# EAGLE board rapidshark-main-breakout-top-mk-1.7-fab (EAGLE 6.5.0)
VERSION: v1.7
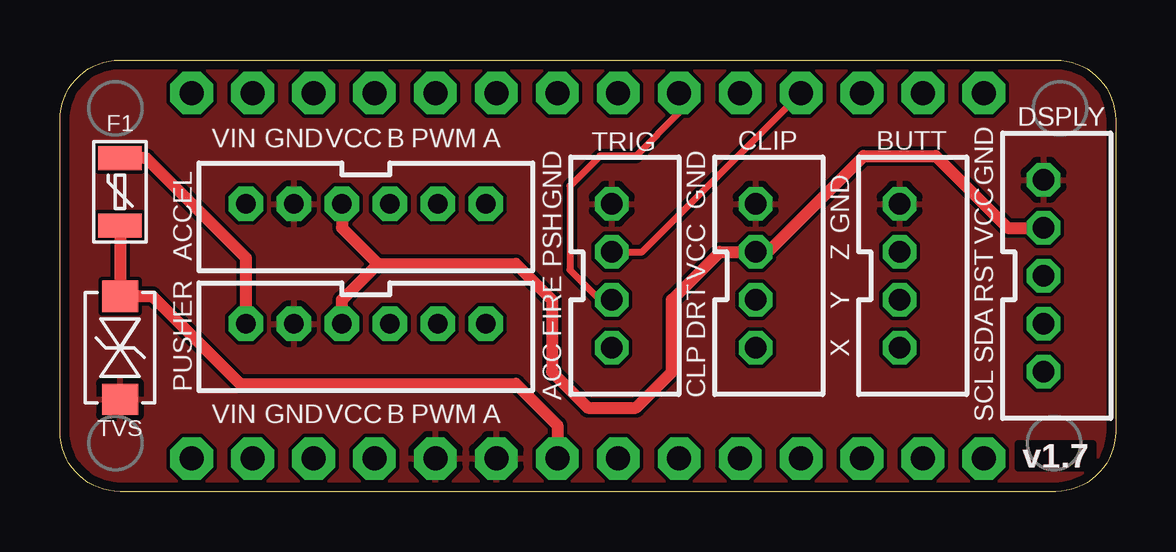
[diagram p0: board, top side]
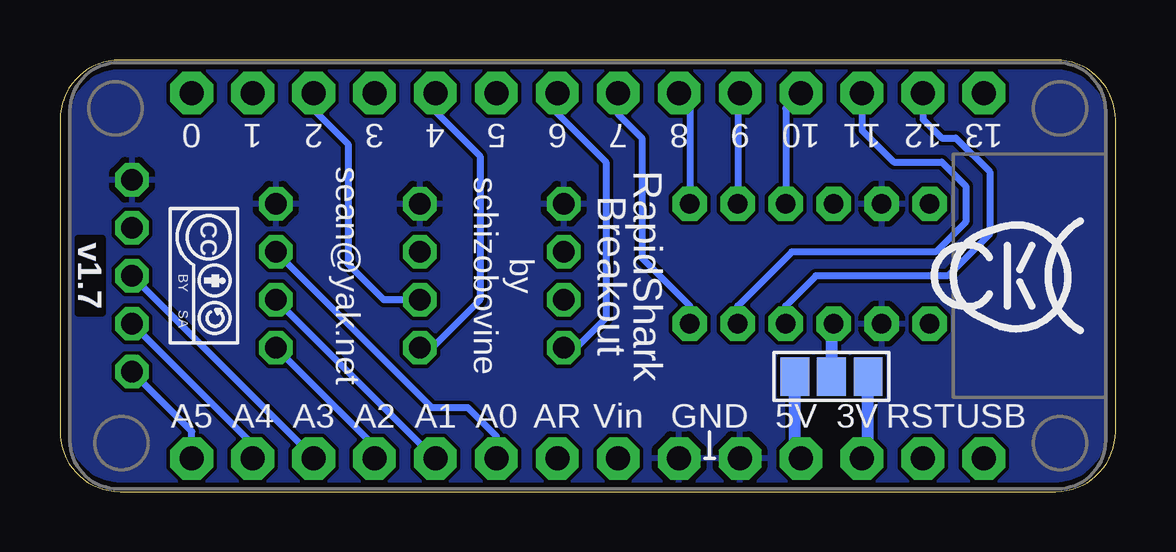
[diagram p1: board, bottom side, seen from below]

Size 44 x 18 mm. Coordinates in mm from the lower left corner, seen from the top.
Outline: 2.5,18 41.5,18 arc-90 44,15.5 44,2.5 arc-90 41.5,0 2.5,0 arc-90 0,2.5 0,15.5 arc-90 2.5,18
Copper layers (1*16): Top 0.0356mm / dielectric 1.5011mm / Bottom 0.0356mm
Design rules "LaenPCBOrder_2": minimum track width 6mil, minimum drill 13mil, track to track 6mil, track to pad 6mil, pad to pad 6mil, via to via 6mil, smd to smd 6mil, copper to edge 15mil, drill to drill 6mil, minimum pad ring 7mil, minimum via ring 7mil, stop-mask expansion 3mil, vias tented up to drill 20mil, thermal gap 10mil

## Footprints (pad centres in the part's own frame; a part is rotated, then mirrored left to right if it is on the bottom)
JST-6-PH-VERT-PTH = drill 0.8 pad 1.422 octagon: 1 -5,0; 2 -3,0; 3 -1,0; 4 1,0; 5 3,0; 6 5,0
JST-4-PH-VERT-PTH = drill 0.9 pad 1.4 octagon: 1 0,0; 2 2,0; 3 4,0; 4 6,0
JST-5-PH-VERT-PTH = drill 0.9 pad 1.4 octagon: 1 -4,0; 2 -2,0; 3 0,0; 4 2,0; 5 4,0
PTC-1206 = smd 1 x 1.8: 1 -1.4,0; 2 1.4,0
SMA-DIODE-TVS-BIDIR = smd 1.3 x 1.5: 1 -2.15,0; 2 2.15,0
ADAFRUIT_METRO_MINI_BACK = drill 1 pad 1.778 octagon: 1 16.51,7.62; 2 13.97,7.62; 3 11.43,7.62; 4 8.89,7.62; 5 6.35,7.62; 6 3.81,7.62; 7 1.27,7.62; 8 -1.27,7.62; 9 -3.81,7.62; 10 -6.35,7.62; 11 -8.89,7.62; 12 -11.43,7.62; 13 -13.97,7.62; 14 -16.51,7.62; 15 -16.51,-7.62; 16 -13.97,-7.62; 17 -11.43,-7.62; 18 -8.89,-7.62; 19 -6.35,-7.62; 20 -3.81,-7.62; 21 -1.27,-7.62; 22 1.27,-7.62; 23 3.81,-7.62; 24 6.35,-7.62; 25 8.89,-7.62; 26 11.43,-7.62; 27 13.97,-7.62; 28 16.51,-7.62
PAD-JUMPER-3-NO_YES_SILK_FULL_BOX = smd 1.2 x 1.6: 1 -1.524,0; 2 0,0; 3 1.524,0

## Placement (x,y rotation side)
ACCEL  M06JST-PH-PTH-VERT  [JST-6-PH-VERT-PTH]  12.75,12 180 top
BUTT  M04JST-PTH-VERT  [JST-4-PH-VERT-PTH]  35,12 270 top
CLIP  M04JST-PTH-VERT  [JST-4-PH-VERT-PTH]  29,12 270 top
DSPLY  M05JST-PH-VERT-PTH  [JST-5-PH-VERT-PTH]  41,9 270 top
F1  120mA  [PTC-1206]  2.5,12.5 90 top
FRAME1  FRAME-LETTERNO_PACKAGE  [DUMMY]  0,0 270 bottom
PUSHER  M06JST-PH-PTH-VERT  [JST-6-PH-VERT-PTH]  12.75,7 180 top
TRIG  M04JST-PTH-VERT  [JST-4-PH-VERT-PTH]  23,12 270 top
TVS  SMAJ12CA  [SMA-DIODE-TVS-BIDIR]  2.5,6 90 top
U1  ADAFRUIT_METRO_MININOSILK-AMBI2  [ADAFRUIT_METRO_MINI_BACK]  22,9 0 top
U$1  [CC-BY-SA-4.0-NO-URL]  38,9 270 bottom
U$4  [COW_SMALL_NOTEXT]  4,9 270 bottom
VSEL  [PAD-JUMPER-3-NO_YES_SILK_FULL_BOX]  11.84,4.8 180 bottom

## Library data of the parts
ACCEL BUTT CLIP DSPLY PUSHER TRIG TVS U1 U$1 U$4 VSEL = A_butts
F1 = A_butts; PROD_ID: RES-11150
FRAME1 = A_butts; DESIGNER: sean@yak.net; VERSION: v1.5

## Nets
3.3V: U1.17 VSEL.1
5V: U1.18 VSEL.3
ACCEL_A: ACCEL.1 U1.9
ACCEL_B: ACCEL.3 U1.11
ACCEL_PWM: ACCEL.2 U1.10
BUTT_X: BUTT.4 U1.25
BUTT_Y: BUTT.3 U1.24
BUTT_Z: BUTT.2 U1.23
DART_DETECT: CLIP.3 U1.3
DISP_RST: DSPLY.3 U1.26
GND: ACCEL.5 BUTT.1 CLIP.1 DSPLY.1 PUSHER.5 TRIG.1 TVS.1 U1.19 U1.20
N$1: F1.1 TVS.2 U1.21
PUSH_A: PUSHER.1 U1.8
PUSH_B: PUSHER.3 U1.13
PUSH_PWM: PUSHER.2 U1.12
SCL: DSPLY.5 U1.28
SDA: DSPLY.4 U1.27
SW_ACCEL: TRIG.4 U1.7
SW_CLIP: CLIP.4 U1.5
SW_FIRE: TRIG.3 U1.6
SW_PUSH: TRIG.2 U1.4
VCC: ACCEL.4 CLIP.2 DSPLY.2 PUSHER.4 VSEL.2
VIN: F1.2 PUSHER.6

## Tracks (layer width: path | path; a pad name or v marks a point on that pad's centre or on a via)
3.3V
  Bottom 0.5: U1.17 10.32,1.63 VSEL.1
5V
  Bottom 0.5: U1.18 13.36,1.63 VSEL.3
ACCEL_A
  Bottom 0.3: U1.9 17.75,16.18 ACCEL.1
ACCEL_B
  Bottom 0.3: U1.11 13.75,15.98 ACCEL.3
ACCEL_PWM
  Bottom 0.3: U1.10 15.75,16.52 ACCEL.2
BUTT_X
  Bottom 0.3: U1.25 30.89,1.89 BUTT.4
BUTT_Y
  Bottom 0.3: U1.24 28.38,1.38 BUTT.3
BUTT_Z
  Bottom 0.3: U1.23 25.81,2.31 27,3.5 28.5,3.5 BUTT.2
DART_DETECT
  Bottom 0.3: CLIP.3 30.5,8 32,9.5 32,14.5 33.43,15.93 U1.3
DISP_RST
  Bottom 0.3: U1.26 33.43,1.43 DSPLY.3
GND
  pour Top (rank 6): 44,0 0,0 0,18 44,18
  pour Bottom (rank 6): 44,0 0,0 0,18 44,18
N$1
  Top 0.5: F1.1 TVS.2 3.85,8.15 7.5,4.5 19,4.5 20.73,2.77 U1.21
PUSH_A
  Bottom 0.3: U1.8 20.73,15.73 19.75,14.75 19.75,9.75 17.75,7.75 PUSHER.1
PUSH_B
  Bottom 0.3: PUSHER.3 13.75,7.75 12.5,9 7,9 5.25,10.75 5.25,13.34 6.66,14.75 7.25,14.75 8.03,15.53 U1.13
PUSH_PWM
  Bottom 0.3: U1.12 10.57,15.07 9.25,13.75 7.25,13.75 6.25,12.75 6.25,11.25 7.5,10 13.5,10 15.75,7.75 PUSHER.2
SCL
  Bottom 0.3: U1.28 38.51,2.51 DSPLY.5
SDA
  Bottom 0.3: U1.27 35.97,1.97 DSPLY.4
SW_ACCEL
  Bottom 0.3: U1.7 23.27,15.77 21.25,13.75 21.25,7.25 22.5,6 TRIG.4
SW_CLIP
  Bottom 0.3: U1.5 28.35,15.85 26.5,14 26.5,8 28.5,6 CLIP.4
SW_FIRE
  Top 0.3: U1.6 25.81,15.81 24,14 22.5,14 21.25,12.75 21.25,9.25 22.5,8 TRIG.3
SW_PUSH
  Top 0.3: TRIG.2 24.27,10 U1.4
VCC
  Top 0.5: ACCEL.4 11.75,11 13.25,9.5 | PUSHER.4 11.75,8 13.25,9.5 | 13.25,9.5 19,9.5 20.5,8 20.5,5 22,3.5 24,3.5 25.5,5 25.5,8 27.5,10 CLIP.2 29.5,10 33.5,14 36.5,14 39.5,11 DSPLY.2
  Bottom 0.5: PUSHER.4 11.84,6.91 VSEL.2
VIN
  Top 0.5: PUSHER.6 7.75,9.75 3.6,13.9 F1.2

## Text on the board
tPlace: VIN | GND | VCC | B | PWM | A | GND | GND | GND | GND | VCC | PSH | VCC | Z | RST | FIRE | DRT | Y | X | SDA | ACC | CLP | SCL | VIN | GND | VCC | B | PWM | A
bPlace: RapidShark | Breakout | by / schizobovine | sean@yak.net